# Altium PCB PCB_New_Project_2023-04-12.pcbdoc
Units mil, origin at the board's own origin, x right, y up, seen from the top; angles counter-clockwise.
Board outline 4474.56 x 5167.97 mil, 2 copper layers (Top Layer, Bottom Layer); 29 components, 29 nets, 178 pads, 17 vias.
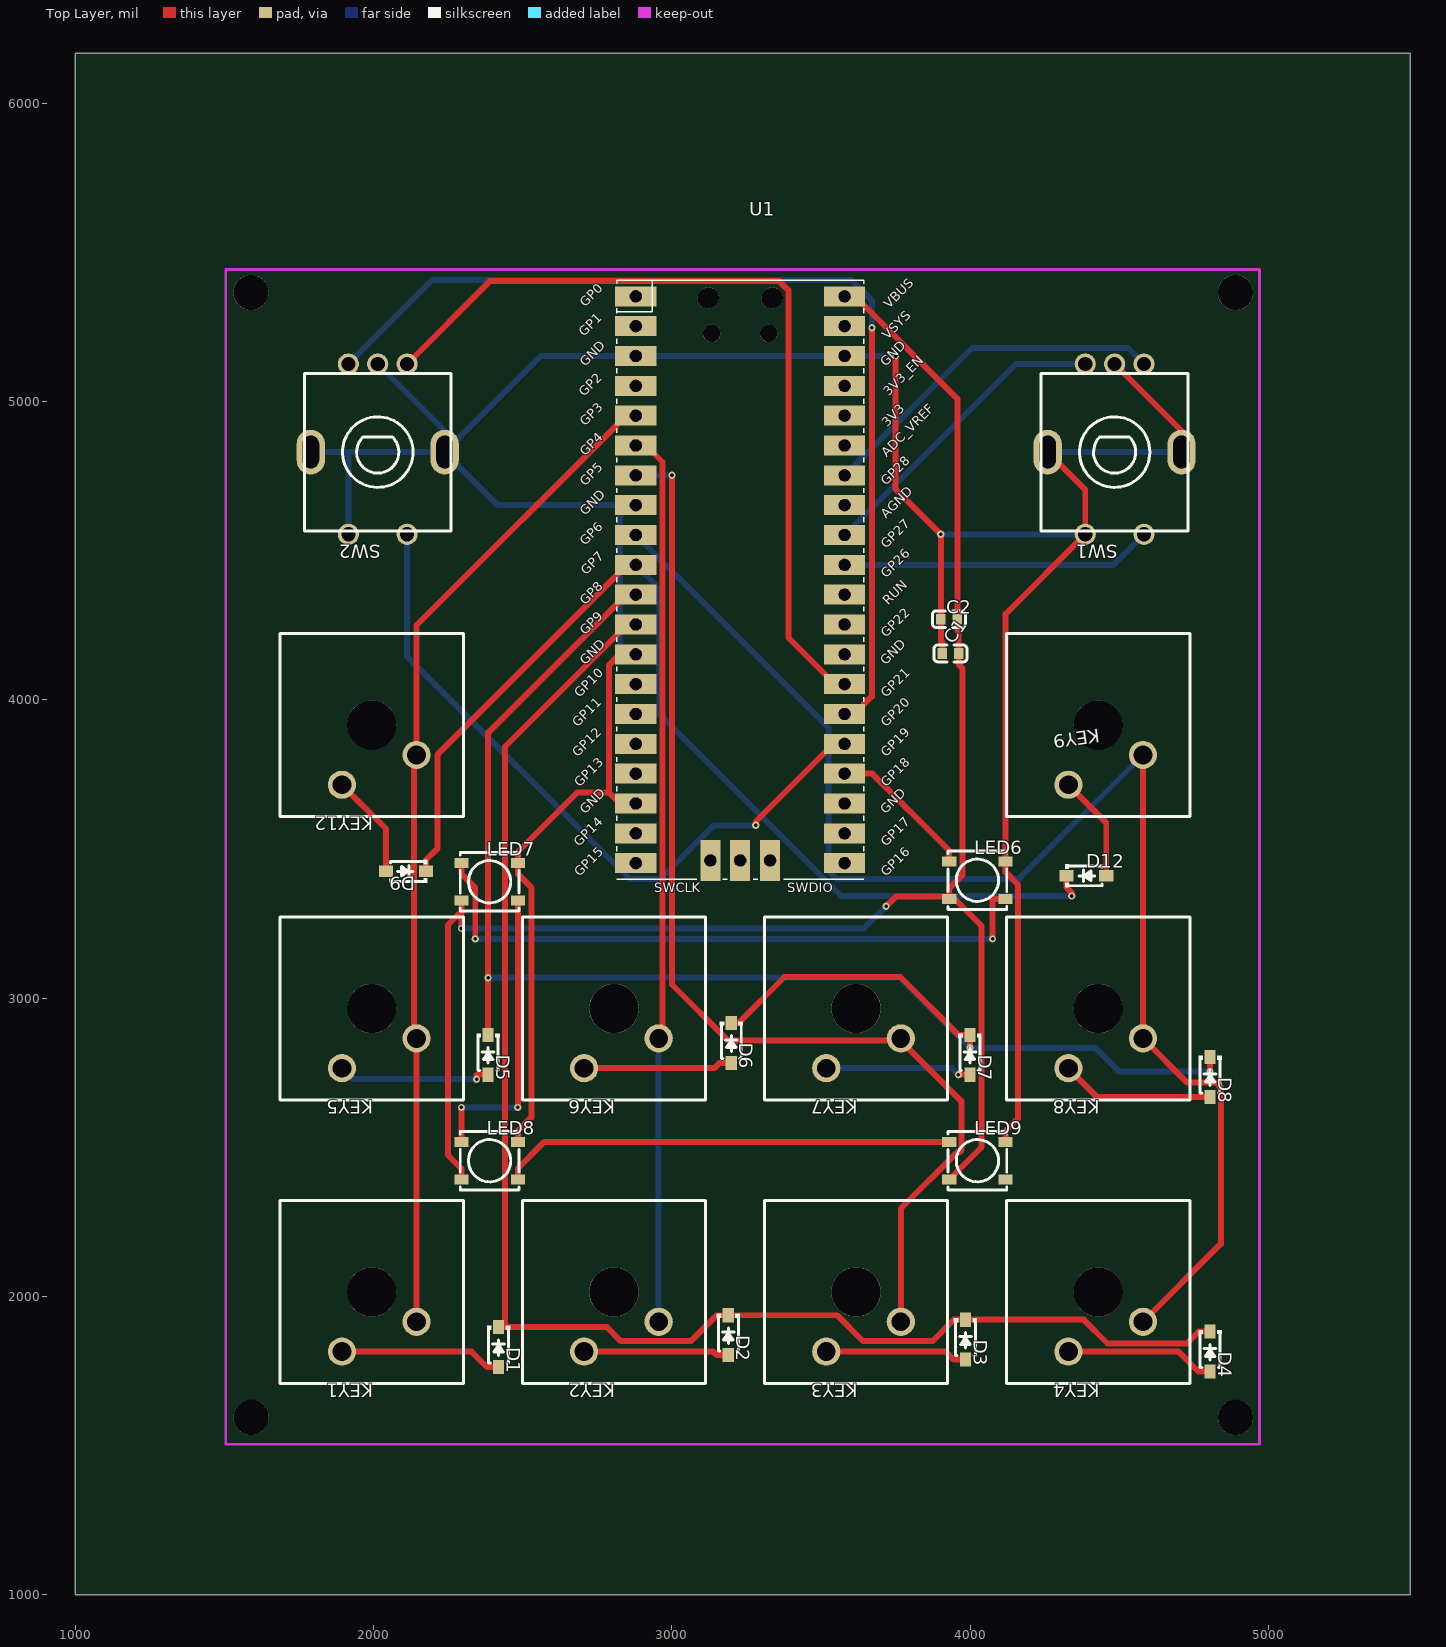
[diagram p0: Top Layer view]
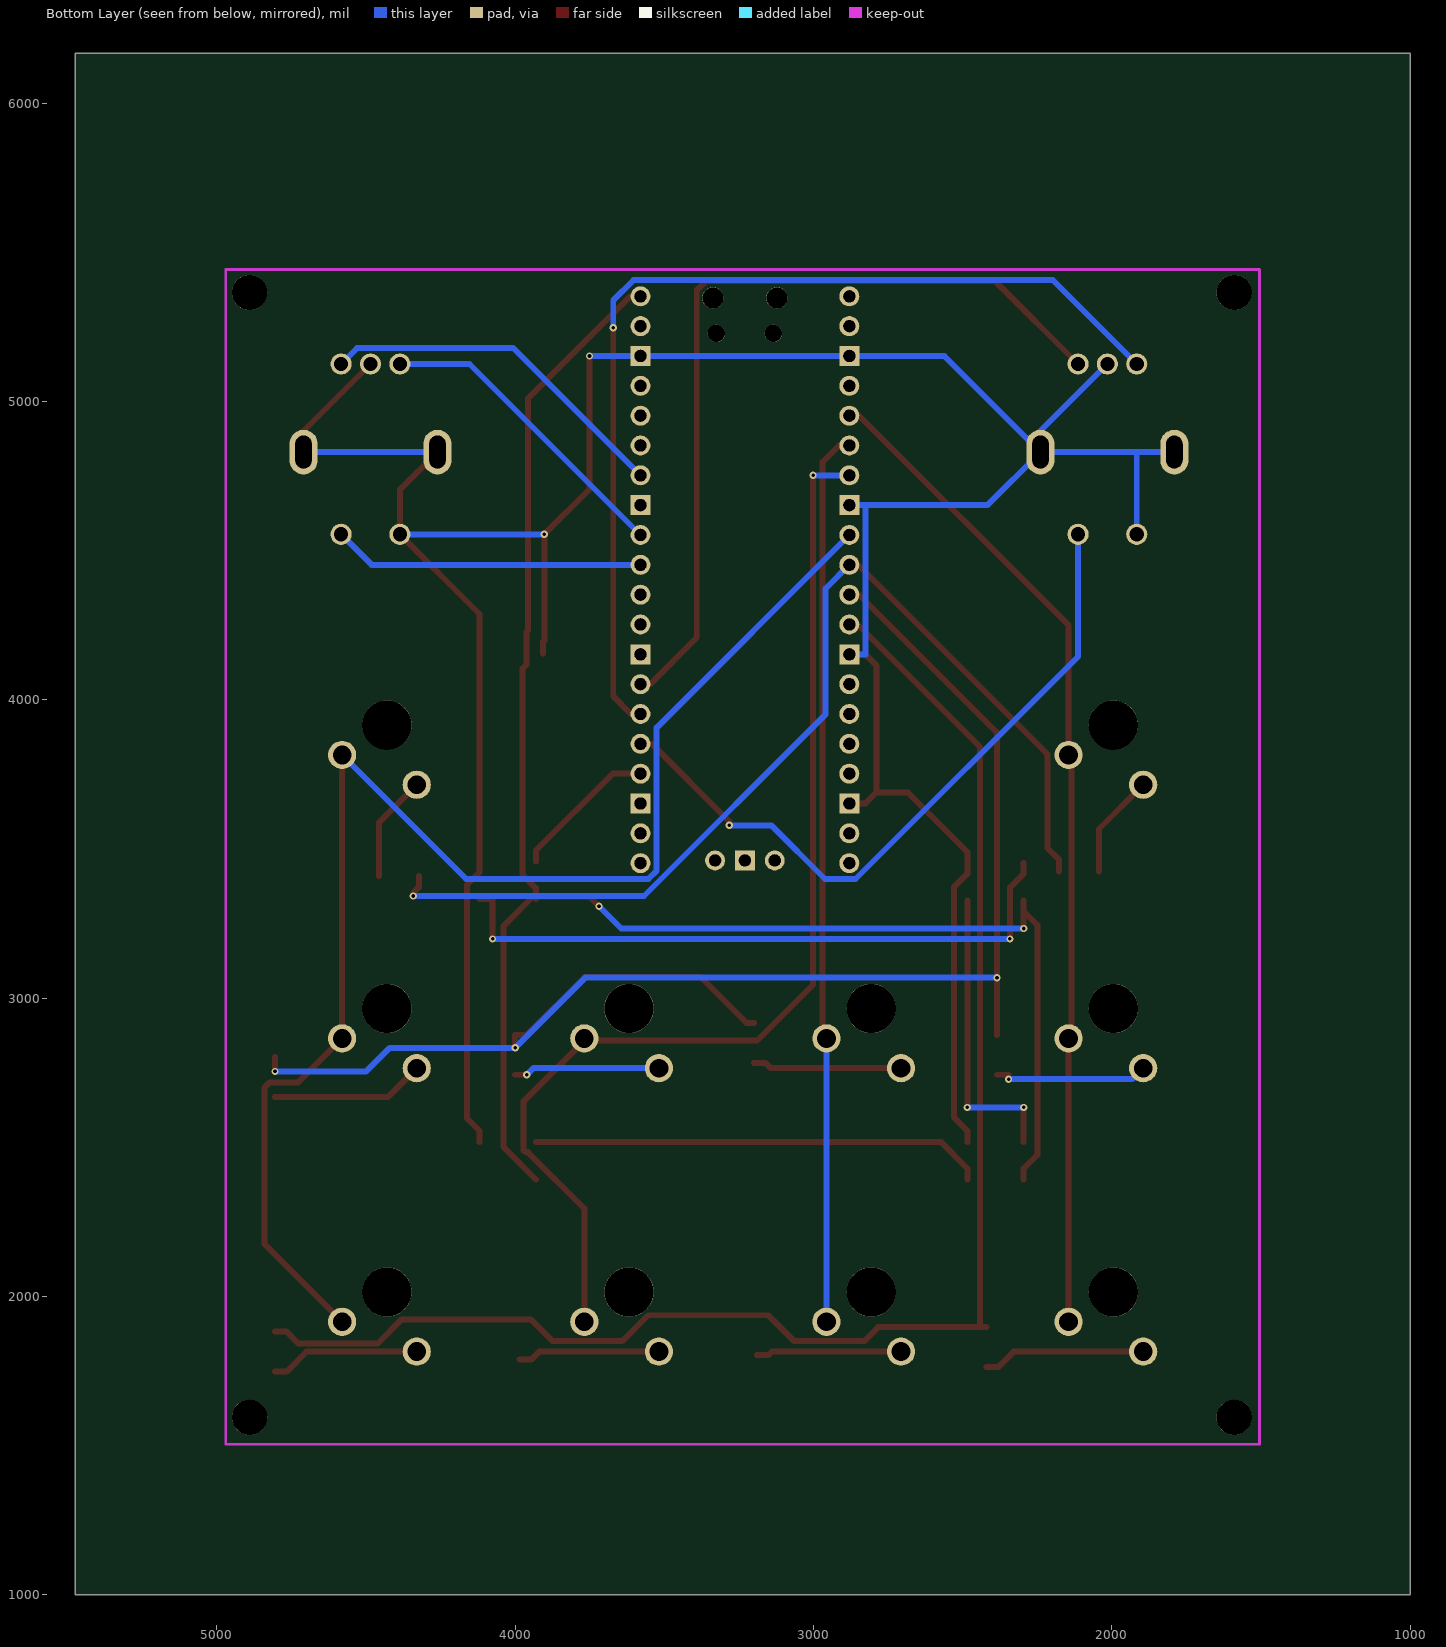
[diagram p1: Bottom Layer view, seen from below]

## Layer stack, top to bottom
Top Layer: signal copper (thickness not stored)
Dielectric: dielectric 12.6, FR-4, Dk 4.8
Bottom Layer: signal copper (thickness not stored)

## Board outline
5474.56,1000 1000,1000 1000,6167.97 5474.56,6167.97

## Components (designator, comment, footprint, x,y, rotation, side; value= is the part's Value field where it differs from the comment)
C1 "10uf" C0603 3934.4,4155.47 r0 top
C2 "0.1uf" C0603 3929.4,4270.47 r0 top
D1 "1N4148WQ" SOD-123_L2.7-W1.6-LS3.7-RD-1 2419.4,1830.47 r270 top
D2 "1N4148WQ" SOD-123_L2.7-W1.6-LS3.7-RD-1 3189.4,1870.47 r270 top
D3 "1N4148WQ" SOD-123_L2.7-W1.6-LS3.7-RD-1 3984.4,1855.47 r270 top
D4 "1N4148WQ" SOD-123_L2.7-W1.6-LS3.7-RD-1 4804.4,1815.47 r270 top
D5 "1N4148WQ" SOD-123_L2.7-W1.6-LS3.7-RD-1 2384.4,2810.47 r270 top
D6 "1N4148WQ" SOD-123_L2.7-W1.6-LS3.7-RD-1 3199.41,2850.47 r270 top
D7 "1N4148WQ" SOD-123_L2.7-W1.6-LS3.7-RD-1 3999.4,2810.47 r270 top
D8 "1N4148WQ" SOD-123_L2.7-W1.6-LS3.7-RD-1 4804.4,2735.47 r270 top
D9 "1N4148WQ" SOD-123_L2.7-W1.6-LS3.7-RD-1 2109.4,3425.47 r180 top
D12 "1N4148WQ" SOD-123_L2.7-W1.6-LS3.7-RD-1 4389.4,3410.47 r0 top
KEY1 "K2-3.6×6.1_SMD" KEY-TH_CPG1511F01S0X 2019.4,1865.47 r180 top
KEY2 "K2-3.6×6.1_SMD" KEY-TH_CPG1511F01S0X 2831.07,1865.47 r180 top
KEY3 "K2-3.6×6.1_SMD" KEY-TH_CPG1511F01S0X 3642.74,1865.47 r180 top
KEY4 "K2-3.6×6.1_SMD" KEY-TH_CPG1511F01S0X 4454.4,1865.47 r180 top
KEY5 "K2-3.6×6.1_SMD" KEY-TH_CPG1511F01S0X 2019.4,2815.47 r180 top
KEY6 "K2-3.6×6.1_SMD" KEY-TH_CPG1511F01S0X 2831.07,2815.47 r180 top
KEY7 "K2-3.6×6.1_SMD" KEY-TH_CPG1511F01S0X 3642.74,2815.47 r180 top
KEY8 "K2-3.6×6.1_SMD" KEY-TH_CPG1511F01S0X 4454.4,2815.47 r180 top
KEY9 "K2-3.6×6.1_SMD" KEY-TH_CPG1511F01S0X 4454.4,3765.47 r180 top
KEY12 "K2-3.6×6.1_SMD" KEY-TH_CPG1511F01S0X 2019.4,3765.47 r180 top
LED6 "XL-3535RGBC-WS2812B" LED-SMD_5050WS2812B 4024.41,3395.47 r0 top
LED7 "XL-3535RGBC-WS2812B" LED-SMD_5050WS2812B 2389.4,3390.47 r0 top
LED8 "XL-3535RGBC-WS2812B" LED-SMD_5050WS2812B 2389.41,2455.47 r0 top
LED9 "XL-3535RGBC-WS2812B" LED-SMD_5050WS2812B 4024.41,2455.47 r0 top
SW1 "PEC11R-4215F-S0024" SW-TH_5P-L12.5-W13.4-P2.50-LS14.5 4484.4,4840.47 r180 top
SW2 "PEC11R-4215F-S0024" SW-TH_5P-L12.5-W13.4-P2.50-LS14.5 2014.4,4840.47 r180 top
U1 "PICO_贴片" RPI_PICO_SMD_TH -1920.6,7355.47 r0 top

## Footprints (in the part's own frame and the unit in brackets; to place one, negate y for a bottom-side part, rotate by r counter-clockwise, add the part's x,y. Pads: shape width x height; smd on the part's side, far side on the other; paste and mask are expansions set on the pad)
C0603 [mm]
  rect 0.8x0.9 smd paste+0 mask+0.051: 1(-0.7,0) 2(0.7,0)
  silkscreen extent -1.41,-0.71 1.39,0.72
KEY-TH_CPG1511F01S0X [mm]
  round 2.4 hole 1.6 paste+0 mask+0.051: 1(-3.175,-1.27) 2(3.175,1.27)
  round 4.2 hole 4.2 unplated paste+0: ""(0.635,-3.81)
  silkscreen extent -7.17,-11.61 8.44,3.99
LED-SMD_5050WS2812B [mm]
  rect 1.2x0.85 smd paste+0 mask+0.051: 1(-2.4,1.6) 2(-2.4,-1.6) 3(2.4,-1.6) 4(2.4,1.6)
  silkscreen extent -2.5,-2.5 2.5,2.5
RPI_PICO_SMD_TH [mil]
  rect 137.79x66.93 smd paste+0 mask+2: 1(4799.99,-2002.75) 2(4799.99,-2102.75) 3(4799.99,-2202.75) 4(4799.99,-2302.75) 5(4799.99,-2402.75) 6(4799.99,-2502.75) 7(4799.99,-2602.75) 8(4799.99,-2702.75) 9(4799.99,-2802.75) 10(4799.99,-2902.75) 11(4799.99,-3002.75) 12(4799.99,-3102.75) 13(4799.99,-3202.75) 14(4799.99,-3302.75) 15(4799.99,-3402.75) 16(4799.99,-3502.75) 17(4799.99,-3602.75) 18(4799.99,-3702.75) 19(4799.99,-3802.75) 20(4799.99,-3902.75) 21(5499.99,-3902.75) 22(5499.99,-3802.75) 23(5499.99,-3702.75) 24(5499.99,-3602.75) 25(5499.99,-3502.75) 26(5499.99,-3402.75) 27(5499.99,-3302.75) 28(5499.99,-3202.75) 29(5499.99,-3102.75) 30(5499.99,-3002.75) 31(5499.99,-2902.75) 32(5499.99,-2802.75) 33(5499.99,-2702.75) 34(5499.99,-2602.75) 35(5499.99,-2502.75) 36(5499.99,-2402.75) 37(5499.99,-2302.75) 38(5499.99,-2202.75) 39(5499.99,-2102.75) 40(5499.99,-2002.75)
  round 66.93 hole 40.16 slot 40.36 at 0 deg paste+0 mask+2: 1(4799.99,-2002.75) 2(4799.99,-2102.75) 4(4799.99,-2302.75) 5(4799.99,-2402.75) 6(4799.99,-2502.75) 7(4799.99,-2602.75) 9(4799.99,-2802.75) 10(4799.99,-2902.75) 11(4799.99,-3002.75) 12(4799.99,-3102.75) 14(4799.99,-3302.75) 15(4799.99,-3402.75) 16(4799.99,-3502.75) 17(4799.99,-3602.75) 19(4799.99,-3802.75) 20(4799.99,-3902.75) 21(5499.99,-3902.75) 22(5499.99,-3802.75) 24(5499.99,-3602.75) 25(5499.99,-3502.75) 26(5499.99,-3402.75) 27(5499.99,-3302.75) 29(5499.99,-3102.75) 30(5499.99,-3002.75) 31(5499.99,-2902.75) 32(5499.99,-2802.75) 34(5499.99,-2602.75) 35(5499.99,-2502.75) 36(5499.99,-2402.75) 37(5499.99,-2302.75) 39(5499.99,-2102.75) 40(5499.99,-2002.75) 41(5049.99,-3893.69) 43(5249.99,-3893.69)
  rect 66.93x66.93 hole 40.16 slot 40.36 at 0 deg paste+0 mask+2: 3(4799.99,-2202.75) 8(4799.99,-2702.75) 13(4799.99,-3202.75) 18(4799.99,-3702.75) 23(5499.99,-3702.75) 28(5499.99,-3202.75) 33(5499.99,-2702.75) 38(5499.99,-2202.75) 42(5149.99,-3893.69)
  rect 66.93x137.79 smd paste+0 mask+2: 41(5049.99,-3893.69) 42(5149.99,-3893.69) 43(5249.99,-3893.69)
  round 70.86 hole 70.86 unplated paste+0: ""(5042.71,-2007.87) ""(5257.27,-2007.87)
  round 59.06 hole 59.06 unplated paste+0: ""(5054.52,-2127.16) ""(5245.46,-2127.16)
  silkscreen extent 4737,-3957 5563,-1949
SOD-123_L2.7-W1.6-LS3.7-RD-1 [mm]
  rect 1.2x0.95 smd paste+0 mask+0.051: 1(-1.7,0) 2(1.7,0)
  silkscreen extent -1.81,-0.98 1.35,0.98
SW-TH_5P-L12.5-W13.4-P2.50-LS14.5 [mm]
  round 1.8 hole 1.2 paste+0 mask+0.051: 1(-2.5,-7.25) 2(0,-7.25) 3(2.5,-7.25) 4(-2.5,7.25) 5(2.5,7.25)
  oval 2.4x3.8 hole 1.4 slot 2.8 at 90 deg paste+0 mask+0.051: 7(-5.7,0.25) 8(5.7,0.25)
  silkscreen extent -6.25,-6.45 6.25,6.95

## Free pads (board coordinates)
  round 118.11 hole 118.11 paste+0 mask+2: 1(4889.4,5365.47) 2(1589.4,1595.47) 2(1589.41,5365.47) 2(4889.4,1595.47)

## Via types
v1: diameter 24.02, hole 12.01, Top Layer to Bottom Layer, tented both sides, 17 vias

## Nets (pads, with @x,y where several pads share a name; then routed paths per layer and width w, separated by ;. In a path a pad name is that pad's centre, name@x,y a point inside that pad or via, vN(x,y) a via of type N, cw(c..) or ccw(c..) an arc to the next point about the centre after c; other vN are vias at no path point)
+5V: C1.2 C2.2 LED6.2 LED7.2 LED8.2 LED9.2 U1.40 | length 6017.2
  Top Layer w20: LED8.2 2294.92,2429.24 2249.45,2474.71 2249.45,3245.26 2294.91,3290.72 LED7.2 v1(2294.91,3233.7) ; U1.40@3579.39,5352.72 3614.05,5352.72 3956.96,5009.81 C2.2 3956.96,4267.41 3956.96,4232.72 3961.96,4227.72 C1.2 3961.96,4117.72 3974.91,4104.77 3974.91,3414.24 3929.91,3369.24 3929.91,3350.86 ; v1(3718.44,3308.18) 3751.93,3341.67 LED6.2@3929.91,3341.67 ; LED9.2 4038.08,2500.65 4038.08,3242.69 3929.91,3350.86 ; LED6.2 LED6.2@3929.91,3341.67 ; LED6.2@3929.91,3341.67 3929.91,3350.86
  Bottom Layer w20: v1(2294.91,3233.7) 3643.96,3233.7 v1(3718.44,3308.18)
D1_2: D1.2 KEY1.2 | length 546.5
  Top Layer w20: KEY1.2 2328.74,1815.47 2380.67,1763.54 D1.2
D2_2: D2.2 KEY2.2 | length 488.3
  Top Layer w20: KEY2.2 3138.74,1815.47 3150.67,1803.54 D2.2
D3_2: D3.2 KEY3.2 | length 477.8
  Top Layer w20: KEY3.2 3918.74,1815.47 3945.67,1788.54 D3.2
D4_2: D4.2 KEY4.2 | length 502.7
  Top Layer w20: KEY4.2 4698.74,1815.47 4765.67,1748.54 D4.2
D5_2: D5.2 KEY5.2 | length 520.4
  Top Layer w20: v1(2345.67,2728.48) 2345.67,2743.54 D5.2
  Bottom Layer w20: KEY5.2 1931.39,2728.48 v1(2345.67,2728.48)
D6_2: D6.2 KEY6.2 | length 500.8
  Top Layer w20: KEY6.2 3142.6,2765.47 3160.67,2783.54 D6.2
D7_2: D7.2 KEY7.2 | length 490.7
  Top Layer w20: v1(3960.67,2743.54) D7.2
  Bottom Layer w20: KEY7.2 3938.74,2765.47 v1(3960.67,2743.54)
D8_2: D8.2 KEY8.2 | length 515.1
  Top Layer w20: KEY8.2 4426.33,2668.54 D8.2
D9_2: D9.2 KEY12.2 | length 351.3
  Top Layer w20: KEY12.2 2042.47,3567.4 D9.2
D12_2: D12.2 KEY9.2 | length 357.6
  Top Layer w20: KEY9.2 4456.33,3588.54 D12.2
GND: C1.1 C2.1 LED6.4 LED7.4 LED8.4 LED9.4 SW1.2 SW1.5 SW1.7 SW1.8 SW2.2 SW2.5 SW2.7 SW2.8 U1.3 U1.8 U1.13 U1.18 U1.38 | length 10932.1
  Top Layer w20: LED8.4 2483.89,2555.22 2529.11,2600.44 2529.11,3371.48 2483.89,3416.7 LED7.4 2483.89,3490.22 2683.26,3689.59 2789.03,3689.59 ; U1.18@2879.39,3652.72 2825.9,3652.72 2789.03,3689.59 ; U1.13@2879.39,4152.72 2825.9,4152.72 2789.03,4115.85 2789.03,3689.59 ; v1(3750.4,5152.72) 3750.4,4706.48 v1(3901.84,4555.04) C2.1 3901.84,4198.22 3906.84,4193.22 3906.84,4174.35 C1.1 ; LED9.4 4118.89,2555.22 4160.86,2597.19 4160.86,3379.73 4118.89,3421.7 4118.89,3440.08 LED6.4 4118.89,4287.96 SW1.5 4385.97,4704.65 SW1.8 ; SW1.2 4708.81,4901.49 SW1.7
  Bottom Layer w20: SW2.8 1915.97,4830.63 ; SW2.5 1915.97,4830.63 ; SW2.2 SW2.7@2274.24,4866.06 ; U1.13@2879.39,4152.72 2825.9,4152.72 2825.9,4652.72 ; U1.8@2879.39,4652.72 2825.9,4652.72 ; v1(3750.4,5152.72) 3579.39,5152.72 2879.39,5152.72 2560.9,5152.72 SW2.7@2274.24,4866.06 ; v1(3901.84,4555.04) SW1.5 ; SW1.8 SW1.7 ; 1915.97,4830.63 SW2.7 ; SW2.7 SW2.7@2274.24,4866.06 ; SW2.7 2416.72,4652.72 2825.9,4652.72
GP3: KEY1.1 KEY5.1 KEY12.1 U1.5 | length 3368.1
  Top Layer w20: KEY1.1 KEY5.1 2135.35,2874.52 2135.35,3806.42 KEY12.1 2144.4,4250.08 2847.04,4952.72 U1.5@2879.39,4952.72
GP4: KEY2.1 KEY6.1 U1.6 | length 2999.8
  Top Layer w20: U1.6@2879.39,4852.72 2913.54,4852.72 2969.11,4797.15 2969.11,2878.51 KEY6.1
  Bottom Layer w20: KEY2.1 KEY6.1
GP5: KEY3.1 KEY7.1 U1.7 | length 3796.1
  Top Layer w20: v1(3000.86,4752.72) 3000.86,3045.99 3188.88,2857.97 KEY7.1@3767.74,2857.97 ; KEY3.1 3767.73,2295.19 3956.84,2484.3 3965.05,2484.3 3970.89,2490.14 3970.89,2654.82 KEY7.1@3767.74,2857.97 ; KEY7.1 KEY7.1@3767.74,2857.97
  Bottom Layer w20: U1.7@2879.39,4752.72 v1(3000.86,4752.72)
GP6: KEY4.1 KEY8.1 KEY9.1 U1.9 | length 4803
  Top Layer w20: KEY4.1 4840.46,2176.53 4840.46,2700.2 4822.4,2718.26 4726.61,2718.26 KEY8.1 KEY9.1
  Bottom Layer w20: U1.9@2879.39,4552.72 3525.16,3906.95 3525.16,3427.74 3553.3,3399.6 4163.53,3399.6 KEY9.1
GP7: D9.1 D12.1 U1.10 | length 3579.3
  Top Layer w20: D9.1 2176.33,3464.2 2215.06,3502.93 2215.06,3817.47 2850.31,4452.72 U1.10@2879.39,4452.72 ; D12.1 4322.47,3371.74 4340.92,3353.29 v1(4340.92,3342.71)
  Bottom Layer w20: U1.10@2879.39,4452.72 2958.82,4373.29 2958.82,3951.51 3567.62,3342.71 v1(4340.92,3342.71)
GP8: D5.1 D6.1 D7.1 D8.1 U1.11 | length 5476.1
  Top Layer w20: v1(2384.4,3068.81) D5.1 2384.4,3890.08 2847.04,4352.72 U1.11@2879.39,4352.72 ; D6.1 3224.13,2917.4 3378.02,3071.29 3766.78,3071.29 3960.67,2877.4 D7.1 v1(3999.4,2833.9) ; v1(4804.4,2754.68) D8.1
  Bottom Layer w20: v1(2384.4,3068.81) 3764.49,3068.81 v1(3999.4,2833.9) 4419.5,2833.9 4498.72,2754.68 v1(4804.4,2754.68)
GP9: D1.1 D2.1 D3.1 D4.1 U1.12 | length 5108.3
  Top Layer w20: D1.1 2441.22,1897.4 ; U1.12@2879.39,4252.72 2851.25,4252.72 2441.22,3842.69 2441.22,1897.4 ; D4.1 4765.67,1882.4 4726.1,1842.83 4460.57,1842.83 4381,1922.4 D3.1 3945.67,1922.4 3874.09,1850.82 3640.91,1850.82 3554.33,1937.4 D2.1 3150.67,1937.4 3064.09,1850.82 2829.25,1850.82 2782.67,1897.4 2441.22,1897.4
GP10: SW1.1 U1.34 | length 1202.5
  Bottom Layer w20: U1.34@3579.39,4752.72 4006.22,5179.55 4529.17,5179.55 SW1.1
GP11: SW1.3 U1.32 | length 1044
  Bottom Layer w20: U1.32@3579.39,4552.72 4152.57,5125.9 SW1.3
GP12: SW1.4 U1.31 | length 1045.8
  Bottom Layer w20: U1.31@3579.39,4452.72 4480.5,4452.72 SW1.4
GP13: SW2.1 U1.27 | length 2823.1
  Top Layer w20: SW2.1 2390.47,5403.55 3360.41,5403.55 3390.8,5373.16 3390.8,4208.96 3547.04,4052.72 U1.27@3579.39,4052.72
GP14: SW2.3 U1.26 | length 3342.8
  Top Layer w20: U1.26@3579.39,3952.72 3611.75,3952.72 3670.72,4011.69 v1(3670.72,5247.22)
  Bottom Layer w20: SW2.3 2197.54,5407.47 3602.28,5407.47 3670.72,5339.03 v1(3670.72,5247.22)
GP15: SW2.4 U1.25 | length 2380.6
  Top Layer w20: v1(3281.64,3579.58) 3281.64,3592.46 3541.9,3852.72 U1.25@3579.39,3852.72
  Bottom Layer w20: SW2.4 2112.82,4145.2 2858.55,3399.47 2960.8,3399.47 3140.91,3579.58 v1(3281.64,3579.58)
GP16: LED6.1 U1.24 | length 493.9
  Top Layer w20: U1.24@3579.39,3752.72 3672.41,3752.72 3929.91,3495.22 LED6.1
LED6_3: LED6.3 LED7.1 | length 2185.3
  Top Layer w20: LED7.1 2294.91,3416.7 2341.26,3370.35 v1(2341.26,3198.72) ; v1(4075.24,3198.72) 4075.24,3332.48 LED6.3
  Bottom Layer w20: v1(2341.26,3198.72) v1(4075.24,3198.72)
LED7_3: LED7.3 LED8.1 | length 998
  Top Layer w20: LED8.1 v1(2294.92,2634.15) ; v1(2483.89,2634.15) LED7.3
  Bottom Layer w20: v1(2294.92,2634.15) v1(2483.89,2634.15)
LED8_3: LED8.3 LED9.1 | length 1519.7
  Top Layer w20: LED8.3 2483.89,2429.24 2573.11,2518.46 LED9.1
pads on no net: KEY1. KEY2. KEY3. KEY4. KEY5. KEY6. KEY7. KEY8. KEY9. KEY12. LED9.3 U1. U1.1 U1.2 U1.4 U1.14 U1.15 U1.16 U1.17 U1.19 U1.20 U1.21 U1.22 U1.23 U1.28 U1.29 U1.30 U1.33 U1.35 U1.36 U1.37 U1.39 U1.41 U1.42 U1.43

## Text inside footprints (layer, text, board x,y; h text height)
U1: Document "Copper Keepouts shown on Dwgs layer" at 2682.15,5572.01 h39.37; Top Overlay "SWDIO" at 3386.87,3355.48 h31.5; Top Overlay "SWCLK" at 2941.99,3355.48 h31.5; Top Overlay "AGND" at 3718.83,4605.96 h31.5 r45; Top Overlay "GND" at 3717.74,5114.86 h31.5 r45; Top Overlay "GND" at 3717.74,4114.87 h31.5 r45; Top Overlay "GND" at 3717.74,3614.87 h31.5 r45; Top Overlay "GND" at 2709.87,3614.87 h31.5 r45; Top Overlay "GND" at 2709.87,4114.87 h31.5 r45; Top Overlay "GND" at 2709.87,4614.86 h31.5 r45; Top Overlay "GND" at 2709.87,5114.86 h31.5 r45; Top Overlay "VBUS" at 3728.52,5308.71 h31.5 r45; Top Overlay "VSYS" at 3724.58,5205.95 h31.5 r45; Top Overlay "3V3_EN" at 3726.45,5015.3 h31.5 r45; Top Overlay "3V3" at 3721.68,4912.11 h31.5 r45; Top Overlay "ADC_VREF" at 3720.44,4812.45 h31.5 r45; Top Overlay "GP28" at 3718.83,4715.96 h31.5 r45; Top Overlay "GP27" at 3718.83,4505.56 h31.5 r45; Top Overlay "GP26" at 3718.83,4405.96 h31.5 r45; Top Overlay "RUN" at 3725.61,4314.86 h31.5 r45; Top Overlay "GP22" at 3718.83,4205.96 h31.5 r45; Top Overlay "GP21" at 3718.83,4005.56 h31.5 r45; Top Overlay "GP20" at 3718.83,3905.96 h31.5 r45; Top Overlay "GP19" at 3718.83,3805.96 h31.5 r45; Top Overlay "GP18" at 3718.83,3705.96 h31.5 r45; Top Overlay "GP17" at 3718.83,3505.96 h31.5 r45; Top Overlay "GP16" at 3718.83,3405.96 h31.5 r45; Top Overlay "GP15" at 2690.96,3405.96 h31.5 r45; Top Overlay "GP14" at 2689.15,3505.96 h31.5 r45; Top Overlay "GP13" at 2690.96,3705.96 h31.5 r45; Top Overlay "GP12" at 2685.21,3805.96 h31.5 r45; Top Overlay "GP11" at 2685.21,3905.96 h31.5 r45; Top Overlay "GP10" at 2690.96,4005.96 h31.5 r45; Top Overlay "GP9" at 2709.87,4214.87 h31.5 r45; Top Overlay "GP8" at 2709.87,4314.86 h31.5 r45; Top Overlay "GP7" at 2713.81,4416.05 h31.5 r45; Top Overlay "GP6" at 2709.87,4514.86 h31.5 r45; Top Overlay "GP5" at 2709.87,4714.86 h31.5 r45; Top Overlay "GP4" at 2709.87,4814.86 h31.5 r45; Top Overlay "GP3" at 2709.87,4914.86 h31.5 r45; Top Overlay "GP0" at 2709.87,5314.86 h31.5 r45; Top Overlay "GP2" at 2705.93,5014.86 h31.5 r45; Top Overlay "GP1" at 2705.93,5215.26 h31.5 r45; Document "U2" at 3197.89,4383.04 h39.37